# EAGLE board Speed_Controll_PCB (EAGLE 7.5.0)
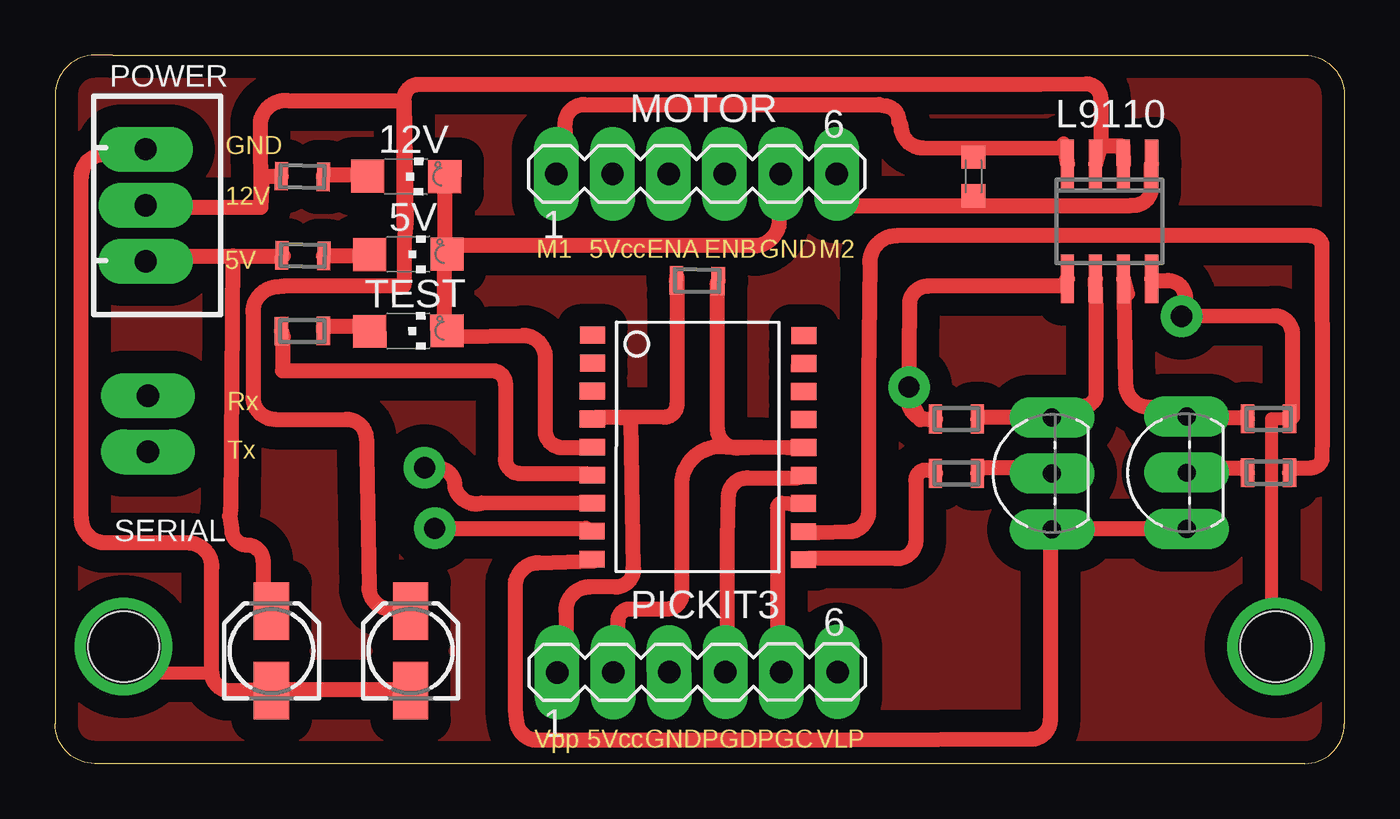
[diagram p0: board, top side]
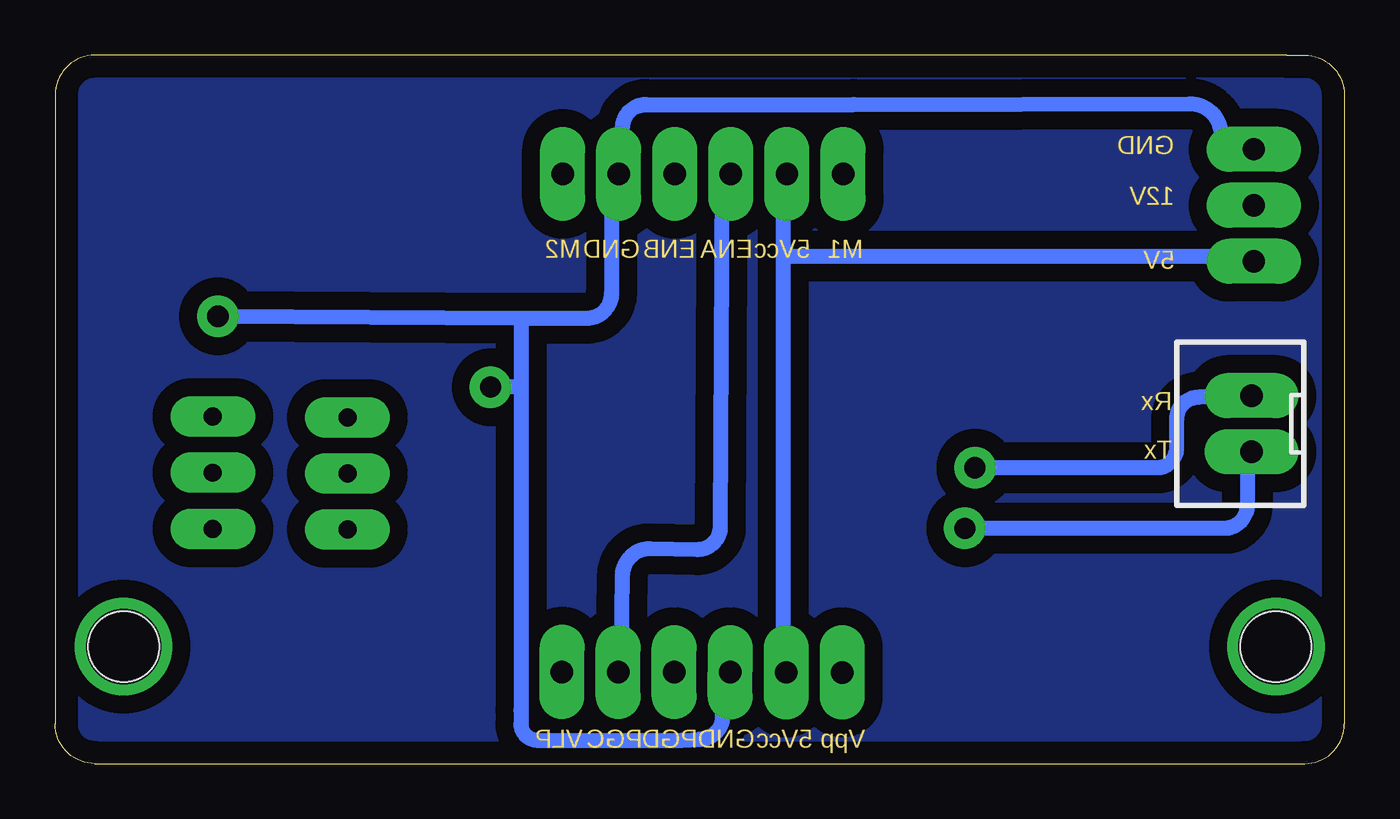
[diagram p1: board, bottom side, seen from below]

Size 58.4 x 32.1 mm. Coordinates in mm from the lower left corner, seen from the top.
Outline: 2.6,32.09 1.8,32.1 arc90 0,30.3 0,1.8 arc90 1.8,0 56.6,0 arc90 58.4,1.8 58.4,30.3 arc90 56.6,32.1 2.6,32.1
Copper layers (1*16): Top 0.035mm / dielectric 1.5mm / Bottom 0.035mm
Design rules "default *": minimum track width 10mil, minimum drill 38mil, track to track 8mil, track to pad 8mil, pad to pad 8mil, via to via 8mil, smd to smd 8mil, copper to edge 40mil, drill to drill 8mil, minimum pad ring 25mil, minimum via ring 18mil, stop-mask expansion 4mil, vias tented up to drill 0mil, thermal gap 10mil
Net classes: 0 default: width 0.686 mm, drill 0.229 mm, clearance 0.229 mm
Holes 3.2 mm at 3.1,5.3 55.3,5.3

## Footprints (pad centres in the part's own frame; a part is rotated, then mirrored left to right if it is on the bottom)
CHIPLED_1206 = smd 1.5 x 1.5: A 0,-1.75; C 0,1.75
C0603K = smd 1.05 x 1.08: 1 -0.875,0; 2 0.875,0
TO92-EBC = drill 0.813 long: B 0,-1.27; C -2.54,-1.27; E 2.54,-1.27
153CLV-0405 = smd 2.6 x 1.6: + 1.8,0; - -1.8,0
SO-18W = smd 0.762 x 1.143: 1 -5.08,-4.788; 2 -3.81,-4.788; 3 -2.54,-4.788; 4 -1.27,-4.788; 5 0,-4.788; 6 1.27,-4.788; 7 2.54,-4.788; 8 3.81,-4.788; 9 5.08,-4.788; 10 5.08,4.788; 11 3.81,4.788; 12 2.54,4.788; 13 1.27,4.788; 14 0,4.788; 15 -1.27,4.788; 16 -2.54,4.788; 17 -3.81,4.788; 18 -5.08,4.788
SO08 = smd 0.6 x 2.2: 1 -1.905,-2.6; 2 -0.635,-2.6; 3 0.635,-2.6; 4 1.905,-2.6; 5 1.905,2.6; 6 0.635,2.6; 7 -0.635,2.6; 8 -1.905,2.6
MA06-1 = drill 1.016 long: 1 -6.35,0; 2 -3.81,0; 3 -1.27,0; 4 1.27,0; 5 3.81,0; 6 6.35,0
JST-XH-03-PACKAGE-LONG-PAD = drill 1.016 long: 1 -2.54,0; 2 0,0; 3 2.54,0
MINI_MELF-0102W = smd 0.6 x 1.3: 1 -0.95,0; 2 0.95,0
JST-XH-02-PACKAGE-LONG-PAD = drill 1.016 long: 1 -1.27,0; 2 1.27,0

## Placement (x,y rotation side)
5V  [CHIPLED_1206]  16,23.08 270.2 top
10NF  10nF  [C0603K]  41.6,26.6 270 top
12V  [CHIPLED_1206]  15.9,26.6 269.7 top
BC549  BC549B  [TO92-EBC]  49.99,13.18 90 top
C3  1uF  [153CLV-0405]  9.8,5.1 90 top
C4  1uF  [153CLV-0405]  16.1,5.1 90 top
IC1  PIC16F628SO  [SO-18W]  29.12,14.33 269.9 top
L9110  [SO08]  47.76,24.57 180 top
MOTOR  [MA06-1]  29.06,26.72 0 top
PICKIT3  [MA06-1]  29.09,4.14 0.1 top
POWER  [JST-XH-03-PACKAGE-LONG-PAD]  4.1,25.3 270 top
Q1  BC549  [TO92-EBC]  43.89,13.15 90 top
R1  10k  [MINI_MELF-0102W]  29.08,21.88 359 top
R2  470  [MINI_MELF-0102W]  11.22,23.02 178.9 top
R3  1k  [MINI_MELF-0102W]  54.97,13.18 180 top
R4  1k  [MINI_MELF-0102W]  40.83,13.15 180 top
R5  10k  [MINI_MELF-0102W]  40.83,15.61 180 top
R6  10k  [MINI_MELF-0102W]  54.97,15.62 0 top
R7  470  [MINI_MELF-0102W]  11.2,26.6 178.9 top
R8  470  [MINI_MELF-0102W]  11.2,19.6 180.3 top
SERIAL  [JST-XH-02-PACKAGE-LONG-PAD]  4.2,15.4 90 bottom
TEST  [CHIPLED_1206]  16,19.6 270.4 top

## Library data of the parts
5V 12V TEST = led
10NF C3 C4 R1-R8 = rcl
BC549 Q1 = transistor-npn
IC1 = microchip; MF: MICROCHIP; MPN: PIC16F628-20I/SO; OC_FARNELL: 9760415; OC_NEWARK: 23C4986
L9110 = linear
MOTOR PICKIT3 = con-lstb; OC_FARNELL: unknown; OC_NEWARK: unknown
POWER SERIAL = Rembrandt Electronics - JST XH Connectors v1-0

## Nets
GND: 5V.C 12V.C C3.- C4.- IC1.5 L9110.5 L9110.8 MOTOR.5 PICKIT3.3 POWER.1 R5.2 R6.2 TEST.C
MCLR: IC1.4 PICKIT3.1 R1.1
N$2: 10NF.1 L9110.4 MOTOR.1
N$3: 5V.A R2.1
N$6: BC549.E L9110.7 R6.1
N$7: 10NF.2 L9110.1 MOTOR.6
N$9: BC549.B R3.2
N$10: Q1.B R4.1
N$11: 12V.A R7.1
N$13: R8.1 TEST.A
N$14: L9110.6 Q1.E R5.1
PGC: IC1.12 MOTOR.3 PICKIT3.5
PGD: IC1.13 PICKIT3.4
PWM: BC549.C IC1.9 Q1.C
RB0: IC1.6 R8.2
RB4: IC1.10 R4.2
RB5: IC1.11 R3.1
RX: IC1.7 SERIAL.2
TX: IC1.8 SERIAL.1
VCC: C3.+ IC1.14 MOTOR.2 PICKIT3.2 POWER.3 R1.2 R2.2
VCC/2: C4.+ L9110.2 L9110.3 POWER.2 R7.2

## Tracks (layer width: path | path; a pad name or v marks a point on that pad's centre or on a via)
GND  (via drill 0.97, 3.4)
  Top 0.6: 7.1,4.1 4.8,4.1 4.8,5.3 v3.1,5.3 | R6.2 55.1,15.62 55.1,5.3 v55.3,5.3
  Top 0.686: C4.- 15.82,3.34 9.87,3.34 C3.- 9.42,3.34 7.9,3.3 arc-90 7.1,4.1 7.1,8.9 arc90 6,10 2.3,10 arc-90 1.19,11.11 1.19,26.59 arc-90 2.2,27.6 2.56,27.57 3.93,27.57 POWER.1 | 5V.C 17.65,23.46 17.65,26.2 12V.C | IC1.5 24.05,14.32 22.98,14.32 arc-90 22.2,15.1 22.2,18.4 arc90 21.2,19.4 18.1,19.35 TEST.C 17.65,19.8 17.65,23 5V.C | 51.25,20.29 51.2,21.1 arc90 50.41,21.89 49.75,21.89 L9110.8 | 51.25,20.29 55.2,20.3 arc-90 56.05,19.45 56.05,15.69 R6.2 | L9110.5 45.69,21.63 39.53,21.63 arc90 38.7,20.8 38.65,16.49 38.65,16.45 arc90 39.5,15.6 R5.2 39.19,15.59 38.68,16.6 v38.68,17.06 | v51.02,20.26 51.25,20.29 | 5V.C 18.1,23.46 31.66,23.46 arc90 32.8,24.6 32.73,25.75 32.73,26.66 MOTOR.5
  Bottom 0.686: 37.3,20.16 37.41,20.17 34.33,20.17 arc-90 33.2,21.3 33.19,25.29 33.19,26.66 MOTOR.5 32.73,27.12 32.73,28.03 32.7,28.8 arc90 31.64,29.86 22.22,29.86 7,29.9 arc90 5.59,28.49 5.29,28.03 4.39,28.03 POWER.1 | 37.3,20.16 37.3,17.06 | 37.3,17.06 37.3,2.43 37.3,1.8 arc-90 36.56,1.06 29.99,1.06 29.2,1.1 arc-90 28.16,2.14 28.16,3.8 PICKIT3.3 | 37.3,17.06 v38.68,17.06 | 37.3,20.16 v51.02,20.26
MCLR
  Top 0.686: 25.65,15.67 27.6,15.7 arc90 28.16,16.26 28.16,22.09 R1.1 | 25.65,15.67 24.96,15.69 24.5,15.69 IC1.4 | PICKIT3.1 23.13,4.26 23.13,6.93 arc-90 24.2,8 25.4,8 arc90 26.2,8.8 26.18,8.83 26.07,15.54 25.65,15.67
N$1
  pour Top (isolate 1.016): 1.8,0.3 1.7,0.3 arc-90 0.3,1.7 0.3,30.4 arc-90 1.7,31.8 56.6,31.8 arc-90 58.1,30.3 58.1,1.8 arc-90 56.6,0.3
N$2
  Top 0.406: 39.3,27.9 41.9,27.9
  Top 0.6: 41.9,27.9 41.6,27.9 10NF.1
  Top 0.686: L9110.4 45.69,28.07 45.82,27.88 39.3,27.9 arc-90 38.32,28.88 38.22,29.08 arc90 37.6,29.8 37.33,29.86 23.96,29.86 arc90 23.1,29 23.13,28.03 23.13,27.12 MOTOR.1
N$3
  Top 0.686: R2.1 13.99,23 5V.A
N$4
  pour Bottom (isolate 0.813): 1.8,0.3 1.7,0.3 arc-90 0.3,1.7 0.3,30.4 arc-90 1.7,31.8 56.7,31.8 arc-90 58.1,30.4 58.1,1.8 arc-90 56.6,0.3
N$6
  Top 0.686: R6.1 53.76,15.69 51.48,15.69 BC549.E 51.02,16.14 49.55,16.14 arc-90 48.5,17.2 48.44,21.23 48.44,21.33 48.58,21.29 L9110.7
N$7
  Top 0.6: 41.9,25.29 41.6,25.29 10NF.2
  Top 0.686: L9110.1 49.65,26.32 49.65,26.05 arc-90 48.9,25.3 48.73,25.29 41.9,25.29 35.71,25.29 arc-90 35.4,25.6 35.48,26.66 MOTOR.6
N$9
  Top 0.686: R3.2 53.76,13.4 51.48,13.4 BC549.B
N$10
  Top 0.686: R4.1 41.88,13.4 45.08,13.4 Q1.B
N$11
  Top 0.686: R7.1 12.16,26.66 13.99,26.66 12V.A
N$13
  Top 0.686: R8.1 12.16,19.8 13.99,19.8 TEST.A
N$14
  Top 0.686: R5.1 41.88,15.69 45.08,15.69 Q1.E 45.53,16.14 46.6,16.2 arc90 47.16,16.76 47.16,20.53 L9110.6
PGC
  Top 0.686: IC1.12 34.05,11.77 33.59,11.77 32.9,11.8 arc90 32.73,11.53 32.73,4.26 PICKIT3.5
  Bottom 0.686: MOTOR.3 28.16,26.66 28.26,10.74 arc90 29.3,9.7 31.46,9.74 arc-90 32.7,8.5 32.73,5.17 32.73,4.26 PICKIT3.5
PGD
  Top 0.686: IC1.13 33.65,12.95 31.34,12.95 arc90 30.5,12.1 30.45,10.2 30.45,4.26 PICKIT3.4
PWM
  Top 0.686: IC1.9 24.45,9.19 21.9,9.1 arc90 20.85,8.05 20.85,2.43 20.9,2 arc90 21.84,1.06 35.93,1.06 44.2,1.1 arc90 45.08,1.98 45.08,10.2 Q1.C 45.53,10.66 51.02,10.66 BC549.C
RB0
  Top 0.686: IC1.6 24.05,13.14 21.05,13.14 arc-90 20.4,13.8 20.4,17.2 arc90 19.8,17.8 10.3,17.8 10.3,19.35 10.33,19.35 R8.2
RB4
  Top 0.686: IC1.10 34.1,9.29 38.09,9.29 arc90 39,10.1 38.99,12.85 arc-90 39.45,13.3 39.7,13.3 R4.2
RB5
  Top 0.686: IC1.11 34.1,10.46 34.56,10.46 36,10.5 arc90 36.85,11.55 36.85,17.52 36.9,22.7 arc-90 38.12,23.92 56.88,23.92 arc-90 57.4,23.4 57.42,16.6 57.42,14.77 57.4,13.9 arc-90 56.9,13.4 56.05,13.4 R3.1
RX  (via drill 0.97)
  Top 0.686: v16.73,13.4 17.3,13.4 arc-90 18.1,12.6 18.1,12.53 arc90 19.33,11.8 19.3,11.8 24.05,11.83 IC1.7
  Bottom 0.686: v16.73,13.4 8.5,13.4 arc-90 7.6,14.3 7.6,15.6 arc90 6.6,16.6 5.3,16.6 4.39,16.6 SERIAL.2
TX  (via drill 0.97)
  Top 0.686: v17.19,10.66 24.05,10.66 IC1.8
  Bottom 0.686: v17.19,10.66 5.44,10.66 arc-90 4.4,11.7 4.39,13.86 SERIAL.1
VCC
  Top 0.686: 8.04,23 4.39,23 POWER.3 | 8.04,23 10.33,23 R2.2 | 8.04,23 7.94,11.54 7.9,11.2 8,10.6 arc90 8.7,9.9 arc-90 9.42,9.18 9.42,7 C3.+ | 31.96,14.35 30.9,14.3 arc-90 29.99,15.21 29.99,21.63 R1.2 | 31.96,14.35 33.19,14.32 33.65,14.32 IC1.14 | 31.96,14.35 30.45,14.35 arc90 28.4,12.9 28.4,7.7 arc-90 27.7,7 26.02,7 arc90 25.5,6.48 25.5,6 25.42,4.26 PICKIT3.2
  Bottom 0.686: 25.42,23 25.42,4.26 PICKIT3.2 | 25.42,23 25.42,26.66 MOTOR.2 | 25.42,23 4.39,23 POWER.3
VCC/2
  Top 0.686: 47.36,27.97 48.38,27.97 L9110.2 | 9.33,25.2 4.74,25.2 4.39,25.75 POWER.2 | 15.89,24.55 15.8,30.03 10.63,30.03 arc90 9.3,29.1 9.33,25.2 | 15.89,24.55 15.82,23.72 15.82,22.09 15.8,21.7 arc-90 15.73,21.63 10.33,21.63 10.1,21.6 arc90 8.96,20.46 8.96,16.6 arc90 9.96,15.6 13.2,15.6 arc-90 14.1,14.7 14.12,14.04 14.22,7.98 arc90 15.2,7 15.82,7 C4.+ | 9.33,25.2 9.4,26.5 arc-90 9.52,26.62 R7.2 | 47.36,27.97 47.36,30.14 arc90 46.7,30.8 44.62,30.78 16.48,30.78 arc90 15.8,30.1 15.82,27.12 15.82,24.38 15.89,24.55 | 47.36,27.97 L9110.3

## Text on the board
Dimension: GND | 12V | M1 | 5Vcc | ENA | ENB | GND | M2 | 5V | Rx | Tx | Vpp | 5Vcc | GND | PGD | PGC | VLP
tValues: HEN!